# Altium PCB PCB.PcbDoc (part 1 of 2)
Units mm, origin at the board's own origin, x right, y up, seen from the top; angles counter-clockwise.
Board outline 140.5 x 50 mm, 2 copper layers (Top Layer, Bottom Layer), stack 1.69 mm thick; 191 components, 142 nets, 1154 pads, 548 vias.
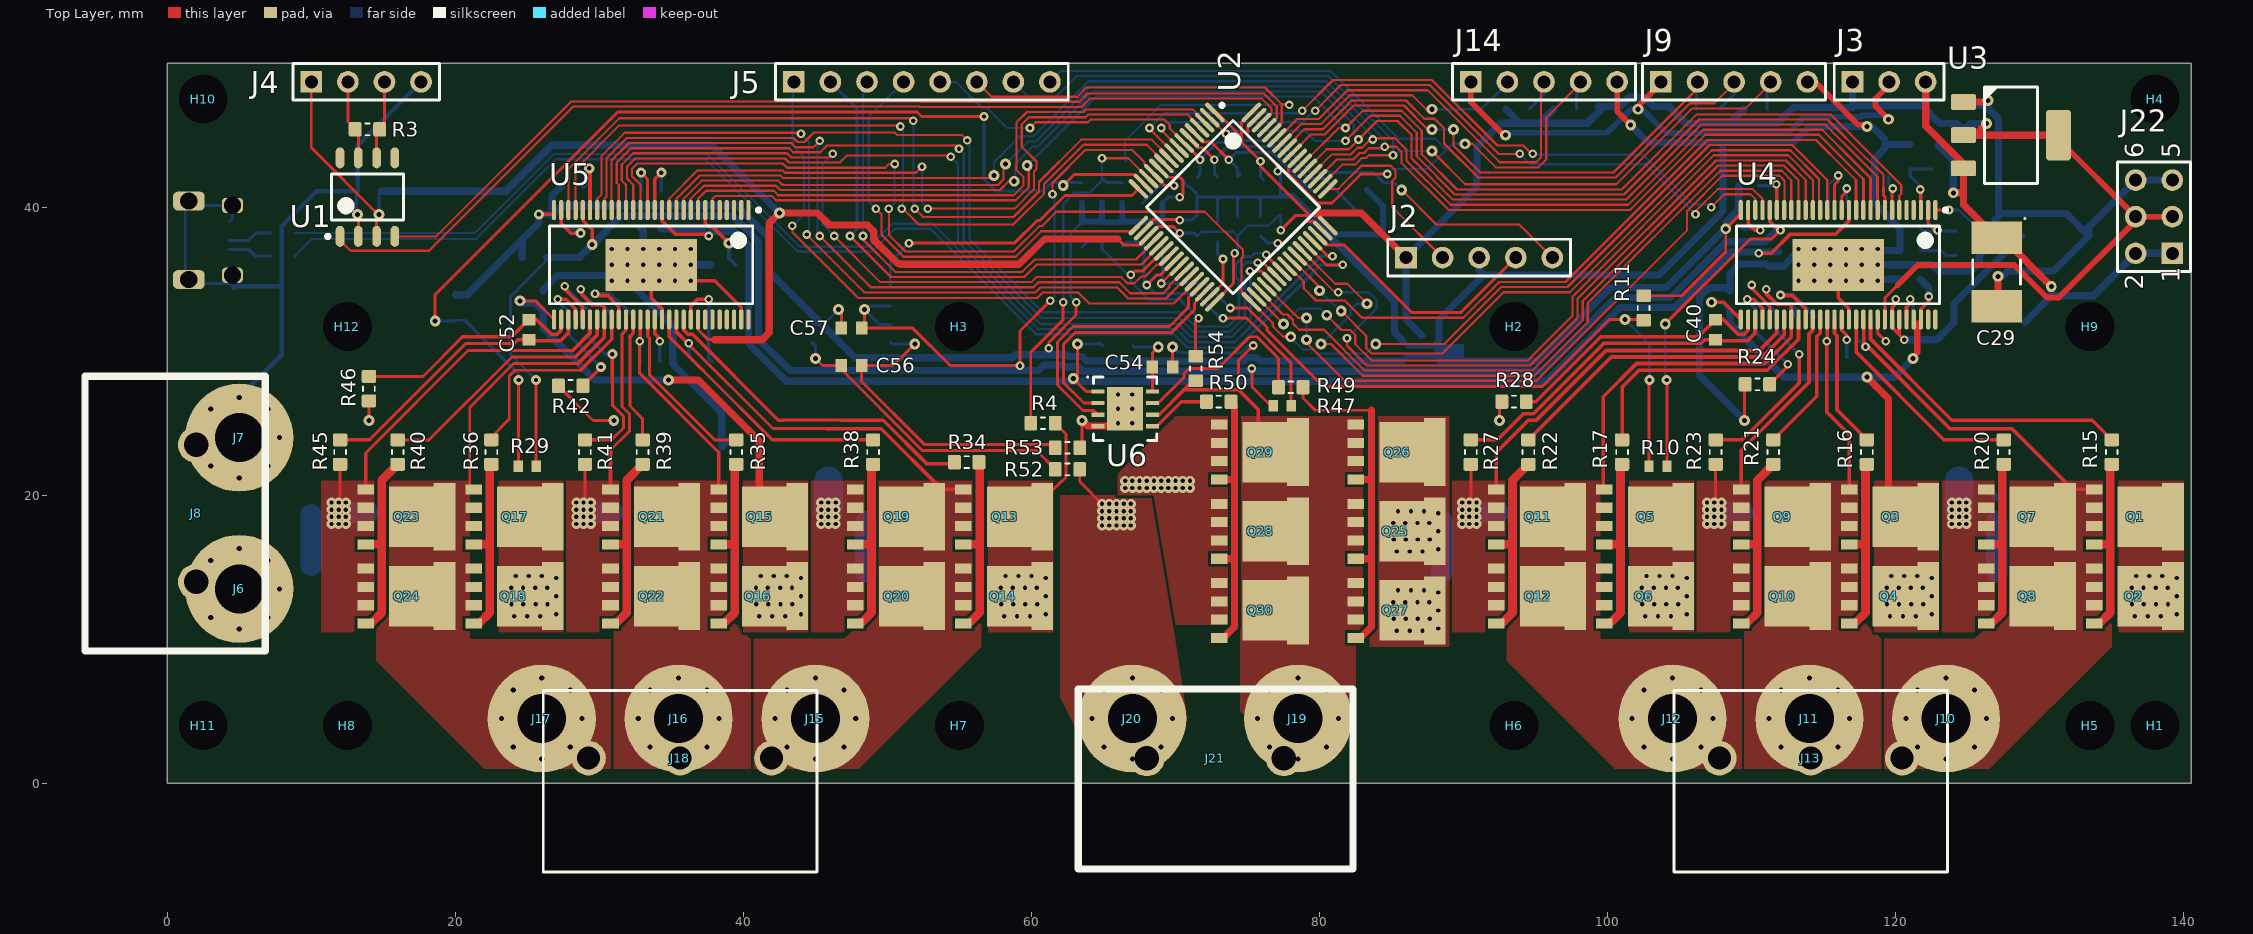
[diagram p0: Top Layer view]
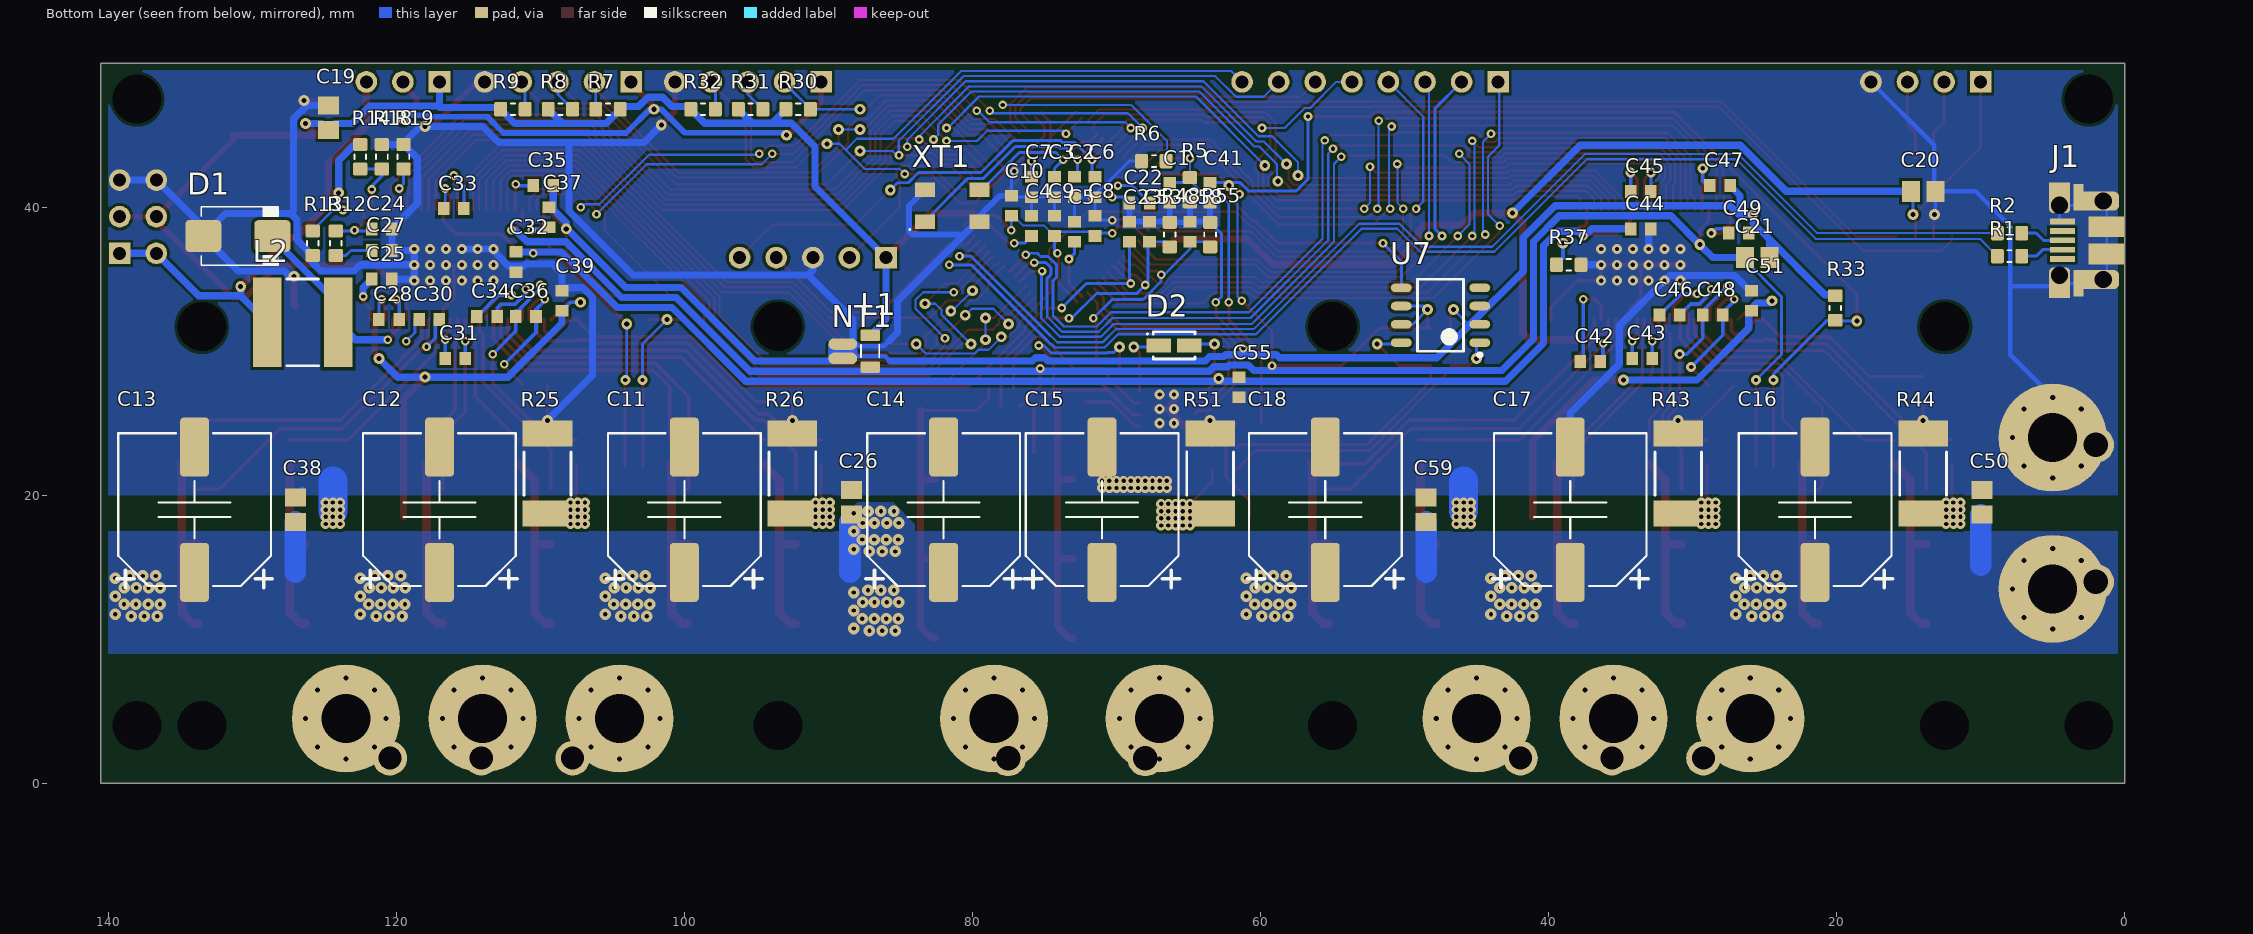
[diagram p1: Bottom Layer view, seen from below]
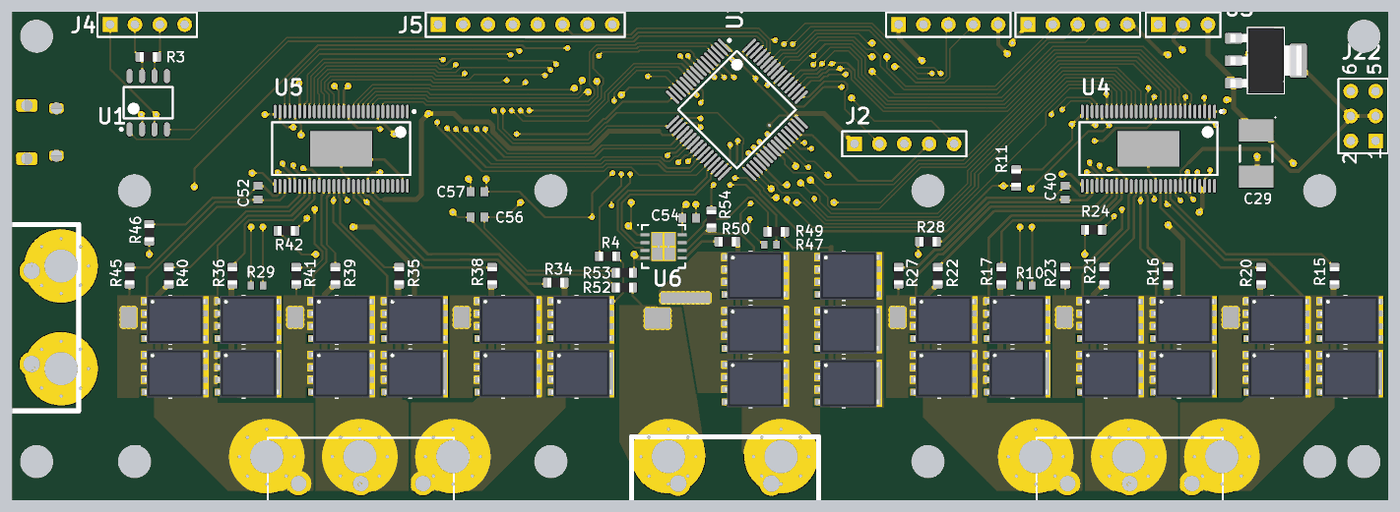
[diagram p3: 3D render of the assembled board from above, using the file's embedded part models]

## Layer stack, top to bottom
Top Solder: solder mask 0.0102, Solder Resist, Dk 3.5
Top Layer: signal copper 0.07
Dielectric1: core 1.55, FR-4, Dk 4.8
Bottom Layer: signal copper 0.07
Bottom Solder: solder mask 0.0102, Solder Resist, Dk 3.5

## Board outline
0,0 0,50 140.5,50 140.5,0

## Design rules (kind name [scope] priority, off if disabled: settings)
Clearance [All] p1: gap=0.203 except(0.185: SMDPad-SMDPad)
ComponentClearance ComponentClearance_1 [HasFootprint('MC000054') or HasFootprint('MC000051')] p1: gap=-100 collisioncheckmode=3 verticalgap=0.254 showdistances=FALSE
ComponentClearance [All] p2: gap=0.254 collisioncheckmode=3 verticalgap=0.254 showdistances=FALSE
DiffPairsRouting [All] p1 off: maxlimit=0.254 minlimit=0.254 mostfreqgap=0.254 toplayer_minwidth=0.381 toplayer_maxwidth=0.381 toplayer_prefwidth=0.381 bottomlayer_minwidth=0.381 bottomlayer_maxwidth=0.381 bottomlayer_prefwidth=0.381 maxuncoupledlength=12.7
FanoutControl Fanout_LCC [IsLCC] p1: bgadir=Out bgaviamode=Centered fanoutstyle=Auto fanoutdirection=Alternating viagrid=0.025 // Fanout_LCC (Default Rule)
FanoutControl Fanout_SOIC [IsSOIC] p2: bgadir=Out bgaviamode=Centered fanoutstyle=Auto fanoutdirection=Alternating viagrid=0.025 // Fanout_SOIC (Default Rule)
FanoutControl Fanout_Small [(CompPinCount < 5)] p3: bgadir=Out bgaviamode=Centered fanoutstyle=Auto fanoutdirection=OutThenIn viagrid=0.025 // Fanout_Small (Default Rule)
FanoutControl Fanout_Default [All] p4: bgadir=Out bgaviamode=Centered fanoutstyle=Auto fanoutdirection=Alternating viagrid=0.025 // Fanout_Default (Default Rule)
HoleSize [All] p1: absolutevalues=TRUE maxlimit=6.35 minlimit=0.3 maxpercent=80.000 minpercent=20.000
HoleToHoleClearance [All] p1 off: gap=0.45 allowstackedmicrovias=TRUE
MinimumAnnularRing [All] p1: minimumring=0.15
MinimumSolderMaskSliver [InPadClass('All Pads') And Not InComponent('J1')] p1: minsoldermaskwidth=0.18
PolygonConnect [All] p1: connectstyle=Direct reliefconductorwidth=0.254 reliefentries=4 polygonreliefangle="90 Angle" airgapwidth=0.254
RoutingCorners [All] p1 off: cornerstyle=45-Degree minsetback=2.54 maxsetback=2.54
RoutingLayers [All] p1 off: top layer_v5=TRUE bottom layer_v5=TRUE
RoutingPriority [All] p1 off: routingpriority=0
RoutingTopology [All] p1 off: topology=Shortest
RoutingVias [All] p1 off: holewidth=0.35 width=0.75 viastyle="Through Hole" minholewidth=0.3 minwidth=0.6 maxholewidth=1 maxwidth=1.7
SilkToBoardRegionClearance [All] p1 off:
SilkToSilkClearance [All] p1 off: silktosilkclearance=0.254
SilkToSolderMaskClearance [IsPad] p1 off: minsilkscreentomaskgap=0.2 clearancetoexposedcopper=FALSE
SolderMaskExpansion [All] p1: expansion=0.102
UnRoutedNet [All] p1 off:
Width [All] p1: maxlimit=5 minlimit=0.152 preferedwidth=0.203 toplayer_minwidth=0.152 bottomlayer_prefwidth=0.203 minimp=50.000000 maximp=50.000000 favimp=50.000000 checkconnectedcopper=TRUE
12 further rules are at their usual default settings.

## Classes and differential pairs
component class Top: C1 C2 C3 C4 C5 C6 C7 C8 C9 C10 C11 C12 C13 C14 C15 C16 C17 C18 C19 C20 C21 C22 H1 H2 H3 H4 H5 H6 H7 H8 H9 H10 H11 H12 J1 J2 J3 J4 J5 J6 J7 J8 J22 L1 NT1 R1 R2 R3 R4 R5 R6 U1 U2 U3 XT1
component class "Motor 1": C41 C42 C43 C44 C45 C46 C47 C48 C49 C50 C51 C52 C59 J14 J15 J16 J17 J18 Q13 Q14 Q15 Q16 Q17 Q18 Q19 Q20 Q21 Q22 Q23 Q24 R29 R30 R31 R32 R33 R34 R35 R36 R37 R38 R39 R40 R41 R42 R43 R44 R45 R46 U5
component class "Motor 0": C23 C24 C25 C26 C27 C28 C29 C30 C31 C32 C33 C34 C35 C36 C37 C38 C39 C40 D1 J9 J10 J11 J12 J13 L2 Q1 Q2 Q3 Q4 Q5 Q6 Q7 Q8 Q9 Q10 Q11 Q12 R7 R8 R9 R10 R11 R12 R13 R14 R15 R16 R17 R18 R19 R20 R21 R22 R23 R24 R25 R26 R27 R28 U4
component class Aux: C53 C54 C55 C56 C57 C58 D2 J19 J20 J21 Q25 Q26 Q27 Q28 Q29 Q30 R47 R48 R49 R50 R51 R52 R53 R54 R55 U6 U7

## Components (designator, comment, footprint, x,y, rotation, side; value= is the part's Value field where it differs from the comment)
C1 "" 1608[0603] 66.3,41 r90 bottom
C2 "" 1608[0603] 72.9,41.4 r270 bottom
C3 "" 1608[0603] 74.3,41.4 r270 bottom
C4 "" 1608[0603] 75.9,38.7 r270 bottom
C5 "" 1608[0603] 72.9,38.3 r270 bottom
C6 "" 1608[0603] 71.5,41.4 r90 bottom
C7 "" 1608[0603] 75.9,41.4 r270 bottom
C8 "" 1608[0603] 71.5,38.7 r90 bottom
C9 "" 1608[0603] 74.3,38.7 r90 bottom
C10 "" 1608[0603] 77.3,40.1 r90 bottom
C11 "EEEFP1E471AP" CAP_ELEC_SIZE_G 100,19 r180 bottom
C12 "EEEFP1E471AP" CAP_ELEC_SIZE_G 117,19 r180 bottom
C13 "EEEFP1E471AP" CAP_ELEC_SIZE_G 134,19 r180 bottom
C14 "EEEFP1E471AP" CAP_ELEC_SIZE_G 82,19 r180 bottom
C15 "EEEFP1E471AP" CAP_ELEC_SIZE_G 71,19 r180 bottom
C16 "EEEFP1E471AP" CAP_ELEC_SIZE_G 21.5,19 r180 bottom
C17 "EEEFP1E471AP" CAP_ELEC_SIZE_G 38.5,19 r180 bottom
C18 "EEEFP1E471AP" CAP_ELEC_SIZE_G 55.5,19 r180 bottom
C19 "" CAPC2012X09N 124.7,46.2 r270 bottom
C20 "" CAPC2012X09N 14,41.1 r0 bottom
C21 "" CAPC2012X09N 25.5,36.5 r0 bottom
C22 "" 1608[0603] 68.4,40.3 r0 bottom
C23 "" 1608[0603] 69.1,38.3 r270 bottom
C24 "" 1608[0603] 121,38.5 r180 bottom
C25 "24V" 1608[0603] 121,35 r180 bottom
C26 "24V" CAPC2012X09N 88.4,19.5 r270 bottom
C27 "" 1608[0603] 121,37 r180 bottom
C28 "10V" 1608[0603] 120.5,32.2 r0 bottom
C29 "T495C686M016ATE250" CAPCP6032X28N 127,35.5 r270 top
C30 "16V" 1608[0603] 117.7,32.2 r0 bottom
C31 "16V" 1608[0603] 115.9,29.5 r0 bottom
C32 "16V" 1608[0603] 111.7,36.191 r90 bottom
C33 "24V" 1608[0603] 116,39.9 r180 bottom
C34 "16V" 1608[0603] 113.7,32.4 r0 bottom
C35 "6.3V" 1608[0603] 109.8,41.5 r0 bottom
C36 "General 0603 capacitor" 1608[0603] 111,32.4 r180 bottom
C37 "10V" 1608[0603] 109.4,39.3 r270 bottom
C38 "24V" CAPC2012X09N 127,19 r270 bottom
C39 "24V" 1608[0603] 108.5,33.5 r90 bottom
C40 "General 0603 capacitor" 1608[0603] 107.5,31.5 r90 top
C41 "" 1608[0603] 63.5,41 r90 bottom
C42 "16V" 1608[0603] 37.1,29.3 r0 bottom
C43 "16V" 1608[0603] 33.5,29.5 r0 bottom
C44 "16V" 1608[0603] 33.6,38.5 r0 bottom
C45 "24V" 1608[0603] 33.6,41.1 r180 bottom
C46 "16V" 1608[0603] 31.6,32.5 r0 bottom
C47 "6.3V" 1608[0603] 28.1,41.5 r0 bottom
C48 "General 0603 capacitor" 1608[0603] 28.6,32.5 r180 bottom
C49 "10V" 1608[0603] 26.8,38.2 r0 bottom
C50 "24V" CAPC2012X09N 9.9,19.5 r270 bottom
C51 "24V" 1608[0603] 25.9,33.5 r90 bottom
C52 "General 0603 capacitor" 1608[0603] 25.1,31.5 r90 top
C53 "" 1608[0603] 67.7,38.3 r270 bottom
C54 "16V" 1608[0603] 69.1,28.9 r0 top
C55 "16V" 1608[0603] 61.5,27.5 r90 bottom
C56 "General 0603 capacitor" 1608[0603] 47.5,29 r0 top
C57 "" 1608[0603] 47.5,31.6 r180 top
C58 "" 1608[0603] 64.9,38.3 r270 bottom
C59 "24V" CAPC2012X09N 48.5,19 r270 bottom
D1 "SS13B" DO-214AA 131,38 r180 bottom
D2 "MBR140SFT1G" DIOM2717X10N 66,30.4 r180 bottom
H1 "M3" "M3 Hole" 138,4 r0 top
H2 "M3" "M3 Hole" 93.5,31.7 r0 top
H3 "M3" "M3 Hole" 55,31.7 r0 top
H4 "M3" "M3 Hole" 138,47.5 r0 top
H5 "M3" "M3 Hole" 133.5,4 r0 top
H6 "M3" "M3 Hole" 93.5,4 r0 top
H7 "M3" "M3 Hole" 55,4 r0 top
H8 "M3" "M3 Hole" 12.5,4 r0 top
H9 "M3" "M3 Hole" 133.5,31.7 r0 top
H10 "M3" "M3 Hole" 2.5,47.5 r0 top
H11 "M3" "M3 Hole" 2.5,4 r0 top
H12 "M3" "M3 Hole" 12.5,31.7 r0 top
J1 "MICRO USB B" USB_0103594-0001LF 1.5,37.7 r90 bottom
J2 "Header 5" HDR1X5 86,36.5 r0 top
J3 "Header 3" HDR1X3 117,48.7 r0 top
J4 "Header 4" HDR1X4 10,48.7 r0 top
J5 "Header 8" HDR1X8 43.5,48.7 r0 top
J6 "M3" "M3 Spade Hole" 5,13.5 r0 top
J7 "M3" "M3 Spade Hole" 5,24 r0 top
J8 "MC000054" MC000054 2,23.5 r270 top
J9 "Header 5" HDR1X5 103.7,48.7 r0 top
J10 "M3" "M3 Spade Hole" 123.5,4.5 r0 top
J11 "M3" "M3 Spade Hole" 114,4.5 r0 top
J12 "M3" "M3 Spade Hole" 104.5,4.5 r0 top
J13 "MC000051" MC000051 107.75,1.75 r0 top
J14 "Header 5" HDR1X5 90.5,48.7 r0 top
J15 "M3" "M3 Spade Hole" 45,4.5 r0 top
J16 "M3" "M3 Spade Hole" 35.5,4.5 r0 top
J17 "M3" "M3 Spade Hole" 26,4.5 r0 top
J18 "MC000051" MC000051 29.25,1.75 r0 top
J19 "M3" "M3 Spade Hole" 78.5,4.5 r0 top
J20 "M3" "M3 Spade Hole" 67,4.5 r0 top
J21 "MC000054" MC000054 68,1.75 r0 top
J22 "Header 3X2" HDR2X3 139.2,36.8 r90 top
L1 "2508056017Y2" FBC2012N 87.1,30 r90 bottom
L2 "NR6028T220M" INDC6060X28N 126.5,32 r0 bottom
NT1 "2mm" NetTie_2mm 89,30.5 r270 bottom net-tie
Q1 "NTMFS4937NT1G" SO8FL 136.5,18.5 r270 top
Q2 "NTMFS4937NT1G" SO8FL_FILL 136.5,13 r270 top
Q3 "NTMFS4937NT1G" SO8FL 119.5,18.5 r270 top
Q4 "NTMFS4937NT1G" SO8FL_FILL 119.5,13 r270 top
Q5 "NTMFS4937NT1G" SO8FL 102.5,18.5 r270 top
Q6 "NTMFS4937NT1G" SO8FL_FILL 102.5,13 r270 top
Q7 "NTMFS4937NT1G" SO8FL 129,18.5 r270 top
Q8 "NTMFS4937NT1G" SO8FL 129,13 r270 top
Q9 "NTMFS4937NT1G" SO8FL 112,18.5 r270 top
Q10 "NTMFS4937NT1G" SO8FL 112,13 r270 top
Q11 "NTMFS4937NT1G" SO8FL 95,18.5 r270 top
Q12 "NTMFS4937NT1G" SO8FL 95,13 r270 top
Q13 "NTMFS4937NT1G" SO8FL 58,18.5 r270 top
Q14 "NTMFS4937NT1G" SO8FL_FILL 58,13 r270 top
Q15 "NTMFS4937NT1G" SO8FL 41,18.5 r270 top
Q16 "NTMFS4937NT1G" SO8FL_FILL 41,13 r270 top
Q17 "NTMFS4937NT1G" SO8FL 24,18.5 r270 top
Q18 "NTMFS4937NT1G" SO8FL_FILL 24,13 r270 top
Q19 "NTMFS4937NT1G" SO8FL 50.5,18.5 r270 top
Q20 "NTMFS4937NT1G" SO8FL 50.5,13 r270 top
Q21 "NTMFS4937NT1G" SO8FL 33.5,18.5 r270 top
Q22 "NTMFS4937NT1G" SO8FL 33.5,13 r270 top
Q23 "NTMFS4937NT1G" SO8FL 16.5,18.5 r270 top
Q24 "NTMFS4937NT1G" SO8FL 16.5,13 r270 top
Q25 "NTMFS4937NT1G" SO8FL_FILL 85.25,17.5 r270 top
Q26 "NTMFS4937NT1G" SO8FL 85.25,23 r270 top
Q27 "NTMFS4937NT1G" SO8FL_FILL 85.25,12 r270 top
Q28 "NTMFS4937NT1G" SO8FL 75.75,17.5 r270 top
Q29 "NTMFS4937NT1G" SO8FL 75.75,23 r270 top
Q30 "NTMFS4937NT1G" SO8FL 75.75,12 r270 top
R1 "RES_0603" RESC1608X55N 8,36.6 r0 bottom
R2 "RES_0603" RESC1608X55N 8,38.2 r0 bottom
R3 "RES_0603" RESC1608X55N 13.9,45.4 r180 top
R4 "RES_0603" RESC1608X55N 60.8,25 r180 top
R5 "RES_0603" RESC1608X55N 64.9,41.2 r270 bottom
R6 "RES_0603" RESC1608X55N 67.4,43.2 r0 bottom
R7 "RES_0603" RESC1608X55N 105.3,46.8 r0 bottom
R8 "RES_0603" RESC1608X55N 108.6,46.8 r180 bottom
R9 "RES_0603" RESC1608X55N 111.9,46.8 r180 bottom
R10 "NTCS0603E3153JMT" RESC1608X06L 103.5,22 r0 top
R11 "RES_0603" RESC1608X55N 102.5,33 r90 top
R12 "RES_0603" RESC1608X55N 124.2,37.5 r270 bottom
R13 "RES_0603" RESC1608X55N 125.8,37.5 r270 bottom
R14 "RES_0603" RESC1608X55N 122.5,43.5 r270 bottom
R15 "RES_0603" RESC1608X55N 135,23 r270 top
R16 "RES_0603" RESC1608X55N 118,23 r270 top
R17 "RES_0603" RESC1608X55N 101,23 r270 top
R18 "RES_0603" RESC1608X55N 121,43.5 r90 bottom
R19 "RES_0603" RESC1608X55N 119.5,43.5 r90 bottom
R20 "RES_0603" RESC1608X55N 127.5,23 r270 top
R21 "RES_0603" RESC1608X55N 111.5,23 r270 top
R22 "RES_0603" RESC1608X55N 94.5,23 r270 top
R23 "RES_0603" RESC1608X55N 107.5,23 r90 top
R24 "RES_0603" RESC1608X55N 110.4,27.7 r0 top
R25 "CSR2512C0R0005F" RESC6432X09N 109.5,21.5 r270 bottom
R26 "CSR2512C0R0005F" RESC6432X09N 92.5,21.5 r270 bottom
R27 "RES_0603" RESC1608X55N 90.5,23 r90 top
R28 "RES_0603" RESC1608X55N 93.5,26.5 r0 top
R29 "NTCS0603E3153JMT" RESC1608X06L 25,22 r0 top
R30 "RES_0603" RESC1608X55N 92.1,46.8 r180 bottom
R31 "RES_0603" RESC1608X55N 95.4,46.8 r180 bottom
R32 "RES_0603" RESC1608X55N 98.7,46.8 r180 bottom
R33 "RES_0603" RESC1608X55N 20.1,33 r90 bottom
R34 "RES_0603" RESC1608X55N 55.5,22.3 r0 top
R35 "RES_0603" RESC1608X55N 39.5,23 r270 top
R36 "RES_0603" RESC1608X55N 22.5,23 r270 top
R37 "RES_0603" RESC1608X55N 38.6,36 r180 bottom
R38 "RES_0603" RESC1608X55N 49,23 r270 top
R39 "RES_0603" RESC1608X55N 33,23 r270 top
R40 "RES_0603" RESC1608X55N 16,23 r270 top
R41 "RES_0603" RESC1608X55N 29,23 r90 top
R42 "RES_0603" RESC1608X55N 28,27.6 r0 top
R43 "CSR2512C0R0005F" RESC6432X09N 31,21.5 r270 bottom
R44 "CSR2512C0R0005F" RESC6432X09N 14,21.5 r270 bottom
R45 "RES_0603" RESC1608X55N 12,23 r90 top
R46 "RES_0603" RESC1608X55N 14,27.4 r90 top
R47 "NTCS0603E3153JMT" RESC1608X06L 77.4,26.2 r180 top
R48 "RES_0603" RESC1608X55N 66.3,38.1 r90 bottom
R49 "RES_0603" RESC1608X55N 78,27.5 r0 top
R50 "RES_0603" RESC1608X55N 73,26.5 r0 top
R51 "CSR2512C0R0005F" RESC6432X09N 63.5,21.5 r90 bottom
R52 "RES_0603" RESC1608X55N 62.5,21.8 r0 top
R53 "RES_0603" RESC1608X55N 62.5,23.3 r0 top
R54 "RES_0603" RESC1608X55N 71.4,28.8 r90 top
R55 "RES_0603" RESC1608X55N 63.5,38.1 r90 bottom
U1 "SN65HVD232D" SOIC127P600X175-8N 13.9,40.7 r90 top
U2 "STM32F405RGT6" STM-LQFP64_N 74,40 r315 top
U3 "AP1117E33G-13" SOT223 128,45 r0 top
U4 "DRV8301" TSSOP50P810X120_HS-57N 116,36 r270 top
U5 "DRV8301" TSSOP50P810X120_HS-57N 33.6,36 r270 top
U6 "LM5109BSD/NOPB" SON80P400X80_HS-9N 66.5,26 r0 top
U7 "AD8418WBRZ" SOIC127P600X175-8N 47.5,32.5 r0 bottom
XT1 "ABM3B-8.000MHZ-10-1-U-T" DFN220P320X110-4N 81.4,40.1 r180 bottom

## Footprints (in the part's own frame and the unit in brackets; to place one, negate y for a bottom-side part, rotate by r counter-clockwise, add the part's x,y. Pads: shape width x height; smd on the part's side, far side on the other; paste and mask are expansions set on the pad)
1608[0603] [mm] "Chip Capacitor, Body 1.6x0.8mm, IPC High Density"
  rect 0.8x0.9 smd: 1(-0.7,0) 2(0.7,0)
  body extent -0.87,-0.48 0.87,0.48, height 1.3
CAP_ELEC_SIZE_G [mm] "Capacitor, polarized, aluminum can; 10.0x10.2mm DxH"
  round 0.635 on Mech15: 0(0,0)
  rrect25% 2x4.1 smd: 1(0,-4.35) 2(0,4.35)
  silkscreen extent -5.4,-5.4 5.4,5.3, body extent -5.25,-6 5.25,6, height 10.5
CAPC2012X09N [mm] "Chip Capacitor, 2-Leads, Body 2.00x1.25mm, IPC Medium Density"
  rect 1.25x1.45 smd: 1(-0.85,0) 2(0.85,0)
  body extent -1.08,-0.7 1.07,0.7, height 0.95
CAPCP6032X28N [mm] "Chip Capacitor, 2-Leads, Body 6.00x3.20mm, IPC Medium Density"
  rect 2.25x3.5 smd: 1(-2.375,0) 2(2.375,0)
  silkscreen extent -3.76,-1.65 0.85,2.01, body extent -3.15,-1.75 3.15,1.75, height 2.8
DFN220P320X110-4N [mm] "DFN, 4-Leads, Body 5.00x3.20mm, Pitch 2.20mm, IPC Medium Density"
  rect 1.4x1 smd: 1(-1.9,-1.1) 3(1.9,1.1) G(-1.9,1.1) G(1.9,-1.1)
  silkscreen extent -3,-1.7 -2.9,-1.6, body extent -2.55,-1.65 2.55,1.65, height 1.1
DIOM2717X10N [mm] "Molded Diode, 2-Leads, Body 2.70x1.65mm, IPC Medium Density"
  rect 1.7x1 smd: A(1.05,0) K(-1.05,0)
  silkscreen extent -1.9,-0.95 1.45,0.95, body extent -1.45,-0.9 1.45,0.9, height 1
DO-214AA [mm] "JEDEC DO214 variation AA. SMB"
  round 0.508 on Mech15: 0(0,0)
  rrect25% 2.5x2.2 smd: A(-2.4,0) K(2.4,0)
  silkscreen extent -2.54,-2.03 2.79,2.03, body extent -2.8,-1.97 2.8,1.98, height 2.62
FBC2012N [mm] "Ferrite Bead Chip, Body 2.0x1.2mm, 0805, IPC Medium Density"
  round 0.508 on Mech15: 0(0,0)
  rrect25% 0.8x1.35 smd: 1(-1.1,0) 2(1.1,0)
  silkscreen extent -0.43,-0.64 0.46,0.63, body extent -1,-0.62 1,0.63, height 0.9
HDR1X3 [mm] "Connector; Header; 3 Position"
  rect 1.5x1.5 hole 0.9: 1(0,0)
  round 1.5 hole 0.9: 2(2.54,0) 3(5.08,0)
  silkscreen extent -1.27,-1.27 6.35,1.27
HDR1X4 [mm] "Connector; Header; 4 Position"
  rect 1.5x1.5 hole 0.9: 1(0,0)
  round 1.5 hole 0.9: 2(2.54,0) 3(5.08,0) 4(7.62,0)
  silkscreen extent -1.27,-1.27 8.89,1.27
HDR1X5 [mm] "Connector; Header; 5 Position"
  rect 1.5x1.5 hole 0.9: 1(0,0)
  round 1.5 hole 0.9: 2(2.54,0) 3(5.08,0) 4(7.62,0) 5(10.16,0)
  silkscreen extent -1.27,-1.27 11.43,1.27
HDR1X8 [mm] "Connector; Header; 8 Position"
  rect 1.5x1.5 hole 0.9: 1(0,0)
  round 1.5 hole 0.9: 2(2.54,0) 3(5.08,0) 4(7.62,0) 5(10.16,0) 6(12.7,0) 7(15.24,0) 8(17.78,0)
  silkscreen extent -1.27,-1.27 19.05,1.27
HDR2X3 [mm] "Connector; Header; 3x2 Position"
  rect 1.5x1.5 hole 0.9: 1(0,0)
  round 1.5 hole 0.9: 2(0,2.54) 3(2.54,0) 4(2.54,2.54) 5(5.08,0) 6(5.08,2.54)
  silkscreen extent -1.27,-1.27 6.35,3.81
INDC6060X28N [mm] "Chip Inductor, 2-Leads, Body 6.00x6.00mm, IPC Medium Density"
  rect 1.98x6.22 smd: 1(-2.46,0) 2(2.46,0)
  silkscreen extent -1.1,-3.01 1.1,3.01, body extent -3.1,-3.1 3.1,3.1, height 2.8
"M3 Hole" [mm] "M3 Hole with no copper"
  round 3 hole 3.4 unplated: 1(0,0)
"M3 Spade Hole" [mm]
  round 7.5 hole 3.4: 1(0,0)
MC000051 [mm] "TERMINAL BLOCK, WIRE TO BRD, 3POS, 10AWG"
  round 2.4 hole 1.6: 1(0,0) 2(6.35,0) 3(12.7,0)
  silkscreen extent -3.15,-7.9 15.85,4.7
MC000054 [mm] "MULTICOMP  Wire-To-Board Terminal Block, 2, 600 V, 30 A, 24 AWG, 10 AWG"
  round 2.5 hole 1.7: 1(0,0) 2(9.52,0)
  silkscreen extent -4.76,-7.7 14.32,4.8
NetTie_2mm [mm] "Net tie, 2mm round"
  oval 0.8x2 smd paste-2: 1(0,0) 2(1,0)
  Top Layer region: 0,1 1,1 1,-1 0,-1
RESC1608X06L [mm] "Chip Resistor, 2-Leads, Body 1.60x0.80mm, IPC High Density"
  rect 0.65x0.8 smd: 1(-0.625,0) 2(0.625,0)
  body extent -0.85,-0.45 0.85,0.45, height 0.6
RESC1608X55N [mm] "Chip Resistor, Body 1.6x0.8mm, EIA 0603, IPC Medium Density"
  round 0.254 on Mech15: 0(0,0)
  rrect25% 0.9x1 smd: 1(-0.85,0) 2(0.85,0)
  Top Layer pour cut-out: -0.6,0.5 -0.4,0.7 0.4,0.7 0.6,0.5 0.6,-0.5 0.4,-0.7 -0.4,-0.7 -0.6,-0.5
  silkscreen extent -0.15,-0.41 0.15,0.41, body extent -0.87,-0.47 0.88,0.48, height 0.54
RESC6432X09N [mm] "Chip Resistor, 2-Leads, Body 6.40x3.20mm, IPC Medium Density"
  rect 1.8x3.45 smd: 1(-2.775,0) 2(2.775,0)
  silkscreen extent -1.5,-1.62 1.5,1.62, body extent -3.32,-1.73 3.32,1.73, height 0.9
SO8FL [mm] "DFN5 5x6, 1.27P  (SO-8FL)  CASE 488AA"
  rect 0.9x0.6 on Top Paste: 7(0,2) 7(0,1.15) 7(0,0.3) 7(0,-0.55) 9(-1.15,2) 9(-1.15,1.15) 9(-1.15,0.3) 9(-1.15,-0.55) 10(1.15,2) 10(1.15,1.15) 10(1.15,0.3) 10(1.15,-0.55)
  rect 0.6x0.9 on Top Paste: 11(-1.875,3) 11(-0.65,3) 11(0.65,3) 11(1.875,3)
  rect 4.7x1.5 smd paste-10 mask+0.075: D(0,2.75)
  rect 4.2x2.2 smd paste-10 mask+0.075: D(0,1.35) D(0,0)
  rect 0.7x1.15 smd paste-0.05 mask+0.075: G(1.905,-2.725) S(-1.905,-2.725) S(-0.635,-2.725) S(0.635,-2.725)
  body extent -2.57,-2.95 2.58,3.2, height 1.13
SO8FL_FILL [mm] "DFN5 5x6, 1.27P  (SO-8FL)  CASE 488AA. Full solder paste"
  rect 4.7x1.5 smd paste-10 mask+0.075: D(0,2.75)
  rect 4.2x2.2 smd paste-10 mask+0.075: D(0,1.35) D(0,0)
  rect 0.7x1.15 smd paste-0.05 mask+0.075: G(1.905,-2.725) S(-1.905,-2.725) S(-0.635,-2.725) S(0.635,-2.725)
  body extent -2.57,-2.95 2.58,3.2, height 1.13
SOIC127P600X175-8N [mm] "SOIC, 8-Leads, Body 4.90x3.90mm, Pitch 1.27mm, IPC Medium Density"
  oval 1.45x0.6 smd: 1(-2.725,1.905) 2(-2.725,0.635) 3(-2.725,-0.635) 4(-2.725,-1.905) 5(2.725,-1.905) 6(2.725,-0.635) 7(2.725,0.635) 8(2.725,1.905)
  silkscreen extent -2.85,-2.5 1.6,2.88, body extent -2,-2.5 2,2.5, height 1.75
SON80P400X80_HS-9N [mm] "SON, 8-Leads, Body 4.00x4.00mm, Pitch 0.80mm, Thermal Pad 3.00x2.49mm, IPC Medium Density"
  rect 0.9x0.3 smd mask+0: 1(-1.895,1.2) 2(-1.895,0.4) 3(-1.895,-0.4) 4(-1.895,-1.2) 5(1.895,-1.2) 6(1.895,-0.4) 7(1.895,0.4) 8(1.895,1.2)
  rect 2.49x3 smd paste-1.245 mask+0: 9(0,0)
  silkscreen extent -2.65,-2.2 2.2,2.25, body extent -2.05,-2.05 2.05,2.05, height 0.8
SOT223 [mm] "SOT223 /SC-73"
  round 1 on Mech15: 0(0,0)
  rrect25% 1.75x1.1 smd: 1(-3.3,2.3) 2(-3.3,0) 3(-3.3,-2.3)
  rrect25% 1.75x3.5 smd: 4(3.3,0)
  silkscreen extent -1.85,-3.35 1.85,3.35, body extent -3.65,-3.35 3.65,3.35, height 1.8
STM-LQFP64_N [mm] "Thin QFP, 64-Leads, Body 10x10mm, Pitch 0.5mm, IPC Medium Density"
  oval 1.8x0.3 smd: 1(-5.55,3.75) 2(-5.55,3.25) 3(-5.55,2.75) 4(-5.55,2.25) 5(-5.55,1.75) 6(-5.55,1.25) 7(-5.55,0.75) 8(-5.55,0.25) 9(-5.55,-0.25) 10(-5.55,-0.75) 11(-5.55,-1.25) 12(-5.55,-1.75) 13(-5.55,-2.25) 14(-5.55,-2.75) 15(-5.55,-3.25) 16(-5.55,-3.75) 33(5.55,-3.75) 34(5.55,-3.25) 35(5.55,-2.75) 36(5.55,-2.25) 37(5.55,-1.75) 38(5.55,-1.25) 39(5.55,-0.75) 40(5.55,-0.25) 41(5.55,0.25) 42(5.55,0.75) 43(5.55,1.25) 44(5.55,1.75) 45(5.55,2.25) 46(5.55,2.75) 47(5.55,3.25) 48(5.55,3.75)
  oval 0.3x1.8 smd: 17(-3.75,-5.55) 18(-3.25,-5.55) 19(-2.75,-5.55) 20(-2.25,-5.55) 21(-1.75,-5.55) 22(-1.25,-5.55) 23(-0.75,-5.55) 24(-0.25,-5.55) 25(0.25,-5.55) 26(0.75,-5.55) 27(1.25,-5.55) 28(1.75,-5.55) 29(2.25,-5.55) 30(2.75,-5.55) 31(3.25,-5.55) 32(3.75,-5.55) 49(3.75,5.55) 50(3.25,5.55) 51(2.75,5.55) 52(2.25,5.55) 53(1.75,5.55) 54(1.25,5.55) 55(0.75,5.55) 56(0.25,5.55) 57(-0.25,5.55) 58(-0.75,5.55) 59(-1.25,5.55) 60(-1.75,5.55) 61(-2.25,5.55) 62(-2.75,5.55) 63(-3.25,5.55) 64(-3.75,5.55)
  silkscreen extent -5.67,-4.25 4.25,4.57, body extent -5,-5 5,5, height 1.6
TSSOP50P810X120_HS-57N [mm] "TSSOP, 56-Leads, Body 14.00x6.10mm, Pitch 0.50mm, Thermal Pad 6.35x3.61mm, IPC Medium Density"
  oval 1.4x0.3 smd: 1(-3.8,6.75) 2(-3.8,6.25) 3(-3.8,5.75) 4(-3.8,5.25) 5(-3.8,4.75) 6(-3.8,4.25) 7(-3.8,3.75) 8(-3.8,3.25) 9(-3.8,2.75) 10(-3.8,2.25) 11(-3.8,1.75) 12(-3.8,1.25) 13(-3.8,0.75) 14(-3.8,0.25) 15(-3.8,-0.25) 16(-3.8,-0.75) 17(-3.8,-1.25) 18(-3.8,-1.75) 19(-3.8,-2.25) 20(-3.8,-2.75) 21(-3.8,-3.25) 22(-3.8,-3.75) 23(-3.8,-4.25) 24(-3.8,-4.75) 25(-3.8,-5.25) 26(-3.8,-5.75) 27(-3.8,-6.25) 28(-3.8,-6.75) 29(3.8,-6.75) 30(3.8,-6.25) 31(3.8,-5.75) 32(3.8,-5.25) 33(3.8,-4.75) 34(3.8,-4.25) 35(3.8,-3.75) 36(3.8,-3.25) 37(3.8,-2.75) 38(3.8,-2.25) 39(3.8,-1.75) 40(3.8,-1.25) 41(3.8,-0.75) 42(3.8,-0.25) 43(3.8,0.25) 44(3.8,0.75) 45(3.8,1.25) 46(3.8,1.75) 47(3.8,2.25) 48(3.8,2.75) 49(3.8,3.25) 50(3.8,3.75) 51(3.8,4.25) 52(3.8,4.75) 53(3.8,5.25) 54(3.8,5.75) 55(3.8,6.25) 56(3.8,6.75)
  rect 3.61x6.35 smd: 57(0,0)
  silkscreen extent -3.92,-7.05 2.7,7.58, body extent -3.1,-7.05 3.1,7.05, height 1.2
USB_0103594-0001LF [mm] "Micro USB B connector"
  rect 0.4x1.75 smd: 1(-1.3,2.825) 2(-0.65,2.825) 3(0,2.825) 4(0.65,2.825) 5(1.3,2.825)
  rect 1.6x1.46 smd: SH(-3.2,3.025) SH(3.2,3.025)
  rect 1.825x0.7 smd: SH(-2.987,1.7) SH(2.987,1.7)
  rrect50% 1.3x2.2 hole 1.2: SH(-2.725,0) SH(2.725,0)
  rrect50% 1.3x2.2 smd: SH(-2.725,0.875) SH(2.725,0.875)
  rrect50% 1.05x1.46 hole 1.2: SH(-2.425,3.025) SH(2.425,3.025)
  rect 1.425x2.5 smd: SH(-0.95,-0.25) SH(0.95,-0.25)

## Part data
C1 C2 C3 C4 C5 C6 C7 C8 C9 C10 C22 C23 C24 C25 C27 C28 C30 C31 C32 C33 C34 C35 C36 C37 C39 C40 C41 C42 C43 C44 C45 C46 C47 C48 C49 C51 C52 C53 C54 C55 C56 C57 C58: library part CAP_0603, "CAP General 0603"
C11 C12 C13 C14 C15 C16 C17 C18: "CAP, FP Series, 470 µF, 25 V, Radial Can - SMD, 10 mm"
C19 C20 C21 C26 C38 C50 C59: library part GRM219R6YA475KA73D, "CAP CER 4.7UF 35V X5R 0805"
C29: "CAP TANT 68UF 16V 20% 2312 250mOhm"
D1: "DIODE, SCHOTTK, RECTIF, 1A, 30V, SMB"
D2: "Rectifier Diode, Single, 40 V, 1 A, SOD-123FL, 2, 550 mV"
H1 H2 H3 H4 H5 H6 H7 H8 H9 H10 H11 H12: library part "M3 Hole", "M3 Hole with no copper"
J1: library part 10103594-0001LF, "MICRO USB B, RECEPTACLE, SMT, RA, 5WAY"
J2 J9 J14: "Header, 5-Pin"
J3: "Header, 3-Pin"
J4: "Header, 4-Pin"
J5: "Header, 8-Pin"
J6 J7 J10 J11 J12 J15 J16 J17 J19 J20: library part "M3 Spade Terminal", "M3 Spade Terminal"
J8 J21: "MULTICOMP Wire-To-Board Terminal Block, 2, 600 V, 30 A, 24 AWG, 10 AWG"
J13 J18: "TERMINAL BLOCK, WIRE TO BRD, 3POS, 10AWG"
J22: "Header, 3-Pin, Dual row"
L1: "FERRITE BEAD, 0.1OHM, 2A, 0805"
L2: "INDUCTOR 22UH 1.4A 175.5 MOHM"
NT1: library part NetTie_2mm
Q1 Q2 Q3 Q4 Q5 Q6 Q7 Q8 Q9 Q10 Q11 Q12 Q13 Q14 Q15 Q16 Q17 Q18 Q19 Q20 Q21 Q22 Q23 Q24 Q25 Q26 Q27 Q28 Q29 Q30: "MOSFET, N CH, 30V, 70A, SO-8 FL"
R1 R2 R3 R4 R5 R6 R7 R8 R9 R11 R12 R13 R14 R15 R16 R17 R18 R19 R20 R21 R22 R23 R24 R27 R28 R30 R31 R32 R33 R34 R35 R36 R37 R38 R39 R40 R41 R42 R45 R46 R48 R49 R50 R52 R53 R54 R55: "RES General 1% 0603"
R10 R29 R47: "THERMISTOR, 15K, 5%, SMD, NTC"
R25 R26 R43 R44 R51: "RES SMD 0.0005 OHM 1% 3W 2512"
U2: "ARM Cortex-M4 32-bit MCU+FPU, 210 DMIPS, 1024 kB Flash, 192 kB Internal RAM, 51 I/Os, 64-pin LQFP, -40 to 85 degC, Tray"
U3: "IC, LDO, REG, 3.3V, SOT223"
U4 U5: "MOTOR DRIVER, 3PH, 56HTSSOP"
U6: "DRIVER, MOSFET, HALF BRIDGE, WSON-8, 1A"
U7: "ANALOG DEVICES Current Sense Amplifier, Bidirectional, 1, 130 µA, NSOIC"
XT1: "Crystal 8MHz ±10ppm 10pF 200 Ohm -10°C ~ 60°C Surface Mount 4-SMD, No Lead (DFN, LCC)"

## Via types
v1: diameter 0.7, hole 0.3, Top Layer to Bottom Layer, 161 vias
v2: diameter 0.8, hole 0.3, Top Layer to Bottom Layer, 136 vias
v3: diameter 0.6, hole 0.3, Top Layer to Bottom Layer, 108 vias
v4: diameter 0.7, hole 0.35, Top Layer to Bottom Layer, 81 vias
v5: diameter 0.75, hole 0.35, Top Layer to Bottom Layer, 57 vias
v6: diameter 0.7, hole 0.3, Top Layer to Bottom Layer, tented bottom, 4 vias
v7: diameter 0.6, hole 0.3, Top Layer to Bottom Layer, tented both sides, 1 vias

## Nets (pads, with @x,y where several pads share a name; then routed paths per layer and width w, separated by ;. In a path a pad name is that pad's centre, name@x,y a point inside that pad or via, vN(x,y) a via of type N, cw(c..) or ccw(c..) an arc to the next point about the centre after c; other vN are vias at no path point)
5V: C29.1 J3.3 J22.1 J22.2 L2.2 R14.1 U3.3 | length 35.2
  Top Layer w0.5: J3.3@122.08,48.5 122.08,45.635 124.7,43.015 U3.3@124.7,42.7 124.7,41 ; v5(124,41) 124.7,41 ; v5(130.8,34.5) 127.425,37.875 C29.1@127,37.875 124.7,40.175 124.7,41
  Bottom Layer w0.5: R14.1@122.95,44.3 124,43.25 v5(124,41) ; L2.2@128.96,32 130.8,33.84 ; v5(130.8,34.5) 130.8,33.84 ; J22.1@139.2,36.8 J22.2@136.66,36.8 133.713,33.853 130.813,33.853 130.8,33.84
AGND: C1.1 C21.1 C22.2 C23.1 C35.1 C37.1 C41.1 C47.1 C49.1 C53.1 C57.2 C58.1 NT1.2 R5.2 R11.2 R33.2 R48.2 R55.2 U2.12 U4.28 U5.28 U7.2 U7.3 | length 149.6
  Top Layer w0.152: U2.12@68.838,42.687 69.444,42.081 70.319,42.081 70.4,42
  Top Layer w0.203: v5(46.6,32.9) 46.8,32.7 C57.2@46.8,31.6 ; v3(61.2,30.2) 61.2,30.61 63.1,32.51 v3(63.1,33.4) ; v3@70.145,40.7 v3(70.3,40.7) 70.505,40.905 70.505,41.895 70.4,42 ; R11.2@102.5,33.85 105.15,33.85 108.2,36.9 v4(108.2,38.5)
  Top Layer w0.25: v1(25.8,39.5) 26.8,39.5 26.85,39.55 U5.28@26.85,39.8 ; v4(108.2,38.5) 109.25,39.55 U4.28@109.25,39.8
  Bottom Layer w0.203: U7.2@44.775,31.865 45.435,31.865 45.565,31.865 v5(46.6,32.9) ; v3(63.1,33.4) 62.695,33.804 62.695,38.146 R55.2@63.5,38.95 ; C22.2@69.1,40.3 C22.2@69.5,40.7 ; 69.6,40.7 v3(70.3,40.7)
  Bottom Layer w0.3: 75.5,29.665 75.612,29.553 ; 85.717,29.317 86.053,29.653 88.004,29.653 NT1.2@88.34,29.317
  Bottom Layer w0.4: C41.1@63.5,40.3 R55.2@63.5,38.95 63.55,39 C58.1@64.9,39 ; R5.2@64.9,40.35 C58.1@64.9,39 ; C1.1@66.3,40.3 R48.2@66.3,38.95 ; C22.2@69.1,40.3 C23.1@69.1,39 C53.1@67.7,39 66.35,39 R48.2@66.3,38.95 ; C58.1@64.9,39 64.95,38.95 R48.2@66.3,38.95
  Bottom Layer w0.5: R33.2@20.025,33.925 20.825,33.925 24.65,37.75 ; C21.1@24.65,36.5 24.65,37.75 ; C47.1@27.4,41.5 26.703,40.803 26.703,39.403 ; 85.717,29.317 75.848,29.317 75.612,29.553 74.988,29.553 74.764,29.329 63.836,29.329 63.534,29.631 62.554,29.631 62.429,29.756 58.891,29.756 58.682,29.547 47.753,29.547 45.435,31.865 41.759,35.541 41.759,37.9 39.553,40.106 27.406,40.106 26.703,39.403 ; NT1.2@88.34,29.317 95.117,29.317 100.234,34.434 104.08,34.434 108.146,38.5 v4(108.2,38.5) 108.2,38.941 109.1,39.841 C35.1@109.1,41.5 ; 24.65,37.75 25.8,38.9 v1(25.8,39.5) 26.606,39.5 26.703,39.403
AUX_H_1: U2.30 U6.2 | length 17.2
  Top Layer w0.203: U6.2@64.605,26.4 63.639,26.4 62.22,27.819 62.22,30.481 63.053,31.314 69.744,31.314 71.311,32.881 71.311,33.358 U2.30@72.02,34.067
AUX_I_1: U2.16 U7.5 | length 21.1
  Top Layer w0.203: v3(51.5,37.5) 58.81,37.5 60.376,39.065 60.565,39.065 62.32,40.82 66.971,40.82 U2.16@67.424,41.273
  Bottom Layer w0.203: U7.5@50.225,34.405 50.225,36.225 v3(51.5,37.5)
AUX_L_1: U2.29 U6.3 | length 18.3
  Top Layer w0.203: U6.3@64.605,25.6 64.325,25.88 63.585,25.88 61.814,27.65 61.814,30.65 62.885,31.72 69.575,31.72 70.905,33.05 70.905,33.723 U2.29@71.523,34.341
AUX_TEMP_1: C53.2 R47.1 R48.1 U2.24 | length 22.5
  Top Layer w0.203: v3(68,34.6) 68.705,35.305 68.951,35.305 U2.24@69.899,36.252 ; v3(73.3,32.3) 74.929,32.3 78.025,29.204 R47.1@78.025,26.2
  Bottom Layer w0.203: R48.1@66.3,37.25 66.65,37.6 C53.2@67.7,37.6 ; C53.2@67.8,37.6 67.8,34.8 v3(68,34.6) 68.594,34.006 71.394,34.006 73.1,32.3 v3(73.3,32.3)
AUX_V_1: C58.2 R54.2 R55.1 U2.22 | length 16.6
  Top Layer w0.203: v3(66.9,35.3) 67.16,35.56 67.728,35.56 68.999,36.831 U2.22@69.127,36.831 ; R54.2@71.4,29.65 71.4,32.1 v3(71.6,32.3)
  Bottom Layer w0.203: R55.1@63.5,37.25 63.85,37.6 C58.2@64.9,37.6 64.9,37.1 66.7,35.3 v3(66.9,35.3) 66.9,34.845 68.145,33.6 70.3,33.6 v3(71.6,32.3)
AVCC: C21.2 C22.1 C57.1 L1.1 R10.2 R29.2 R47.2 U2.13 U4.24 U5.24 U7.6 U7.7 | length 189
  Top Layer w0.152: v3(61.455,40.9) 61.455,41.68 63.754,43.979 66.974,43.979 67.853,43.1 67.853,42.965 U2.13@68.485,42.333
  Top Layer w0.203: v1(25.6,28) 25.6,22.025 R29.2@25.625,22 ; v5(48.4,32.9) 48.4,31.8 C57.1@48.2,31.6 51.761,31.6 54.361,29 v3(59.2,29) 59.2,31.4 v3(61.3,33.5) ; U2.13@68.485,42.333 68.485,42.269 69.254,41.5 v3(69.9,41.5) ; v3(75.3,28.8) 75.3,27.535 76.635,26.2 R47.2@76.775,26.2 ; v5(104,31.9) 109.895,37.795 111.395,37.795 v3(112,38.4) ; v1(104.1,28) 104.125,27.975 R10.2@104.125,22
  Top Layer w0.25: U5.24@28.85,39.8 28.872,39.8 28.872,39.052 29.5,38.424 v5(29.5,37.4) ; U4.24@111.25,39.8 111.25,39.009 111.859,38.4 v3(112,38.4)
  Bottom Layer w0.152: v3(61.3,33.5) 61.6,33.8 61.6,40.755 v3(61.455,40.9)
  Bottom Layer w0.203: v1(25.6,28) 23.82,29.78 23.82,33.781 C21.2@26.539,36.5 ; U7.7@50.225,31.865 49.435,31.865 v5(48.4,32.9) 48.635,33.135 U7.6@50.225,33.135 ; C22.1@67.7,40.3 67.703,40.297 68.906,41.5 ; 69.006,41.5 v3(69.9,41.5) ; v5(104,31.9) 104,28.1 v1(104.1,28)
  Bottom Layer w0.5: C21.2@26.35,36.5 26.539,36.5 28.6,36.5 v5(29.5,37.4) 31.503,39.403 39.262,39.403 41.056,37.609 41.056,30.844 43.228,28.672 60.481,28.672 60.862,29.053 62.138,29.053 62.263,28.928 63.243,28.928 63.557,28.614 95.449,28.614 100.566,33.731 104.372,33.731 108.238,37.597 110.915,37.597 111.718,38.4 v3(112,38.4)
BOOT0_1: J5.6 R6.1 U2.60 | length 39.1
  Top Layer w0.152: J5.6@56.2,48.7 57.229,47.671 63.171,47.671 63.811,48.311 76.211,48.311 77.381,47.141 ; U2.60@76.787,45.162 U2.60@76.687,45.162 77.381,45.856 77.381,47.141 ; v3(77.9,47.1) 77.859,47.141 77.381,47.141
  Bottom Layer w0.152: R6.1@66.55,43.2 66.5,43.25 66.5,44.622 68.978,47.1 v3(77.9,47.1)
CAN_D_1: U1.1 U2.62 | length 71.2
  Top Layer w0.152: U1.1@11.995,37.975 11.995,37.705 12.729,36.971 18.173,36.971 28.188,46.985 52.208,46.985 52.234,46.96 63.465,46.96 64.041,47.536 75.981,47.536 76.67,46.846 76.67,46.559 U2.62@75.98,45.869
CAN_H_1: J4.2 R3.2 U1.7 | length 5.6
  Top Layer w0.203: J4.2@12.54,48.7 12.54,45.91 R3.2@13.05,45.4 13.265,45.185 U1.7@13.265,43.425
CAN_L_1: J4.3 R3.1 U1.6 | length 5.5
  Top Layer w0.203: U1.6@14.535,43.425 14.535,45.185 R3.1@14.75,45.4 15.08,45.73 J4.3@15.08,48.7
CAN_R_1: U1.4 U2.61 | length 67.5
  Top Layer w0.152: U1.4@15.805,37.975 18.675,37.975 28.041,47.341 52.355,47.341 52.381,47.315 63.318,47.315 63.894,47.891 76.128,47.891 77.026,46.994 77.026,46.208 U2.61@76.333,45.515
DCBUS: C11.1 C12.1 C13.1 C14.1 C15.1 C16.1 C17.1 C18.1 C25.1 C26.2 C38.2 C39.1 C50.2 C51.1 C59.2 J6.1 J8.2 Q1.D Q2.D Q3.D Q4.D Q5.D Q6.D Q13.D Q14.D Q15.D Q16.D Q17.D Q18.D Q25.D Q26.D Q27.D R4.1 U4.29 U4.53 U4.54 U5.29 | length 89.3
  Top Layer w0.203: v5(24.5,33.5) 25.55,33.5 U5.29@26.85,32.2 ; Q13.D@60.75,18.5 60.75,19.645 62.1,20.995 62.16,20.995 62.405,21.24 62.405,24.245 R4.1@61.65,25
  Top Layer w0.25: v5(107.2,33.4) 108.05,33.4 U4.29@109.25,32.2 ; v5(121.2,29.5) v5@121.25,29.55 ; U4.53@121.25,32.2 121.4,32.05 121.4,29.7 121.6,29.9 121.6,32.05 U4.54@121.75,32.2 121.772,32.2 121.772,32.948 122.3,33.476
  Top Layer w0.5: v5(34.8,28) 36.875,28 41.1,23.775 Q15.D@41.1,18.5 ; v5(118,28.2) 119.5,26.7 Q3.D@119.5,18.5
  Bottom Layer w0.25: v5(107.2,33.4) 107.9,33.4 C39.1@108.5,32.8
  Bottom Layer w0.5: v5(24.5,33.5) 24.653,33.347 25.553,33.347 26.1,32.8 26.1,31.6 29.7,28 v5(34.8,28) ; C39.1@108.5,32.8 108.5,31.964 112.264,28.2 v5(118,28.2) 119.9,28.2 v5(121.2,29.5) ; C25.1@121.7,35 122.3,34.4 v3(122.3,33.8)
  Bottom Layer w1.5: 10,15.15 C50.2@10,18.65 ; 48.5,14.65 C59.2@48.5,18.15 ; 88.5,14.65 C26.2@88.5,18.15 ; 127,14.65 C38.2@127,18.15
  other v2: 85.35,10.6 86.25,10.6 87.15,10.6 88.25,10.75 85.15,11.425 85.975,11.425 86.825,11.425 87.65,11.425 24.1,11.6 25,11.6 25.9,11.6 41.1,11.6 42,11.6 42.9,11.6 58.1,11.6 59,11.6 59.9,11.6 102.6,11.6 103.5,11.6 104.4,11.6 119.6,11.6 120.5,11.6 121.4,11.6 136.6,11.6 137.5,11.6 138.4,11.6 27,11.75 44,11.75 61,11.75 105.5,11.75 122.5,11.75 139.5,11.75 88.25,12 23.9,12.425 24.725,12.425 25.575,12.425 26.4,12.425 40.9,12.425 41.725,12.425 42.575,12.425 43.4,12.425 57.9,12.425 58.725,12.425 59.575,12.425 60.4,12.425 102.4,12.425 103.225,12.425 104.075,12.425 104.9,12.425 119.4,12.425 120.225,12.425 121.075,12.425 121.9,12.425 136.4,12.425 137.225,12.425 138.075,12.425 138.9,12.425 85.125,12.575 85.95,12.575 86.8,12.575 87.625,12.575 27,13 44,13 61,13 105.5,13 122.5,13 139.5,13 88.25,13.25 85.45,13.4 86.35,13.4 87.25,13.4 23.875,13.575 24.7,13.575 25.55,13.575 26.375,13.575 40.875,13.575 41.7,13.575 42.55,13.575 43.375,13.575 57.875,13.575 58.7,13.575 59.55,13.575 60.375,13.575 102.375,13.575 103.2,13.575 104.05,13.575 104.875,13.575 119.375,13.575 120.2,13.575 121.05,13.575 121.875,13.575 136.375,13.575 137.2,13.575 138.05,13.575 138.875,13.575 27,14.25 44,14.25 61,14.25 105.5,14.25 122.5,14.25 139.5,14.25 24.2,14.4 25.1,14.4 26,14.4 41.2,14.4 42.1,14.4 43,14.4 58.2,14.4 59.1,14.4 60,14.4 102.7,14.4 103.6,14.4 104.5,14.4 119.7,14.4 120.6,14.4 121.5,14.4 136.7,14.4 137.6,14.4 138.5,14.4 85.35,16.1 86.25,16.1 87.15,16.1 88.25,16.25 85.15,16.925 85.975,16.925 86.825,16.925 87.65,16.925 88.25,17.5 85.125,18.075 85.95,18.075 86.8,18.075 87.625,18.075 88.25,18.75 85.45,18.9 86.35,18.9 87.25,18.9
  other v4: 5,10.7 3.02,11.52 6.98,11.52 2.2,13.5 7.8,13.5 3.02,15.48 6.98,15.48 5,16.3
EN_GATE_1: U2.33 U4.16 U5.16 | length 108.7
  Top Layer w0.152: U5.16@32.85,39.8 32.85,41.56 32.271,42.139 32.271,42.661 32.639,43.029 42.739,43.029 43.024,42.744 49.844,42.744 50.1,43 v3(50.5,43) ; v3(50.1,39.9) 50.1,38.081 51.26,36.921 58.77,36.921 60.534,38.685 60.723,38.685 61.725,39.687 72.032,39.687 74.679,37.04 74.679,36.56 74.585,36.466 74.585,34.111 U2.33@75.273,33.424 75.276,33.424 76.746,31.954 76.746,31.729 77.475,31 v5(78,31) ; v5(83.9,30.5) 88.661,30.5 92.617,34.455 97.219,34.455 107.075,44.312 112.823,44.312 115.25,41.885 U4.16@115.25,39.8
  Bottom Layer w0.152: v3(50.1,39.9) 50.5,40.3 v3(50.5,43) ; v5(78,31) 78,30.975 78.875,30.1 79.575,30.1 79.829,29.846 83.246,29.846 v5(83.9,30.5)
ENC_V: J3.2 J9.1 J14.1 | length 38.9
  Top Layer w0.4: J14.1@90.5,48.6 90.5,47.3 92.8,45 v5(92.9,45) ; v5(102.1,46.8) 102.1,47 J9.1@103.7,48.6 ; v5(119.5,46.1) 118.59,47.01 118.59,47.55 J3.2@119.54,48.5
  Bottom Layer w0.4: v5(92.9,45) 93.075,45.175 99.975,45.175 101.6,46.8 v5(102.1,46.8) 102.4,46.8 104.053,45.147 112.551,45.147 113.679,46.275 117.575,46.275 117.678,46.378 119.222,46.378 v5(119.5,46.1)
GH_A_2: R15.1 U4.47 | length 21
  Top Layer w0.25: U4.47@118.25,32.2 118.25,30.85 123.886,25.214 133.636,25.214 R15.1@135,23.85
GH_A_3: R34.1 U5.47 | length 23.6
  Top Layer w0.203: 42.836,25.214 46.736,25.214
  Top Layer w0.25: U5.47@35.85,32.2 35.85,31.474 36.152,31.172 36.464,31.172 42.422,25.214 42.836,25.214 ; 46.736,25.214 49.704,25.214 52.743,22.175 R34.1@54.825,22.175
GH_B_2: R16.1 U4.42 | length 9.3
  Top Layer w0.25: U4.42@115.75,32.2 115.75,31.25 115.922,31.078 115.922,25.928 R16.1@118,23.85
GH_B_3: R35.1 U5.42 | length 11.8
  Top Layer w0.203: 33.478,30.91 33.478,28.361 37.989,23.85 R35.1@39.5,23.85
  Top Layer w0.25: U5.42@33.35,32.2 33.35,31.038 33.478,30.91
GH_C_2: R17.1 U4.37 | length 18.6
  Top Layer w0.25: R17.1@101,23.85 101,27.5 102.178,28.678 111.089,28.678 113.25,30.839 U4.37@113.25,32.2
GH_C_3: R36.1 U5.37 | length 14.5
  Top Layer w0.203: R36.1@22.5,23.85 22.4,23.95 23.745,25.295 23.745,28.271 24.152,28.678 28.689,28.678
  Top Layer w0.25: 28.689,28.678 30.85,30.839 U5.37@30.85,32.2
GL_A_2: R20.1 U4.45 | length 15
  Top Layer w0.25: U4.45@117.25,32.2 117.25,29.944 123.344,23.85 R20.1@127.5,23.85
GL_A_3: R38.1 U5.45 | length 18.3
  Top Layer w0.203: 34.85,31.009 37.08,28.78 37.081,28.78 37.48,28.381 37.48,28.38 42.009,23.85
  Top Layer w0.25: 34.85,31.009 U5.45@34.85,32.2 ; 42.009,23.85 R38.1@49,23.85
GL_B_2: R21.1 U4.40 | length 9.7
  Top Layer w0.25: R21.1@111.5,23.85 114.522,26.872 114.522,31.022 114.75,31.25 U4.40@114.75,32.2
GL_B_3: R39.1 U5.40 | length 8.8
  Top Layer w0.203: 32.122,31.022 32.122,26.188 33,25.31 R39.1@33,23.85
  Top Layer w0.25: 32.122,31.022 32.35,31.25 U5.40@32.35,32.2
GL_C_2: R22.1 U4.35 | length 21.8
  Top Layer w0.25: R22.1@94.5,23.85 100.25,29.6 110.73,29.6 112.25,31.12 U4.35@112.25,32.2
GL_C_3: R40.1 U5.35 | length 17.9
  Top Layer w0.203: R40.1@16,23.85 18.175,23.85 23.925,29.6 28.329,29.6
  Top Layer w0.25: 28.329,29.6 29.85,31.12 U5.35@29.85,32.2
GND: C2.2 C3.2 C4.1 C5.1 C6.1 C7.2 C8.2 C9.2 C10.2 C11.2 C12.2 C13.2 C14.2 C15.2 C16.2 C17.2 C18.2 C19.1 C20.1 C24.2 C25.2 C26.1 C27.2 C29.2 C32.1 C38.1 C39.2 C44.1 C50.1 C51.2 C55.1 C59.1 D1.A J1.5 J1.SH J2.3 J4.4 J7.1 J8.1 J9.5 J14.5 J22.5 J22.6 NT1.1 Q7.S Q8.S Q19.S Q20.S Q28.S Q29.S Q30.S R6.2 R13.2 R18.2 R19.2 R24.1 R25.1 R26.1 R28.1 R37.2 R42.1 R43.1 R44.1 R46.1 R51.2 R53.2 U1.2 U2.18 U2.63 U3.1 U4.44 U4.57 U5.44 U5.55 U5.57 U6.4 U6.9 XT1.G | length 309.9
  Top Layer w0.203: v5(13.2,39.5) 13.265,39.435 U1.2@13.265,37.975 ; v5(14,25.2) R46.1@14,26.55 ; R42.1@27.15,27.6 29.55,25.2 v5(31,25.2) ; R53.2@63.35,23.3 63.5,23.45 v5(63.5,25.2) ; U2.18@67.777,38.374 67.825,38.374 67.825,38.485 68.495,39.156 70.244,39.156 v3(70.3,39.1) ; U2.63@75.626,46.223 74.995,45.591 74.995,44.96 77.1,42.855 v3(77.1,42.5) ; v5(92.5,25.2) R28.1@92.5,26.55 ; v5(109.5,25.2) R24.1@109.5,27.7
  Top Layer w0.25: U5.57@33.6,36 33.6,33.701 34.35,32.951 U5.44@34.35,32.2 ; v1(34.15,36) v1(36.35,36) v1(36.35,34.9) 38,34.9 39.85,33.05 U5.55@39.85,32.2 ; U4.57@116,36 116,33.701 116.75,32.951 U4.44@116.75,32.2
  Top Layer w0.4: v1(30.85,36) v1(31.95,36) v1(33.05,36) U5.57@33.6,36 ; J14.5@100.66,48.6 100.66,46.64 v5(101.6,45.7) ; J9.5@113.86,48.6 114.5,48.6 117.375,45.725 117.875,45.725 v5(118,45.6)
  Top Layer w0.5: v5@63.48,25.2 v5(63.5,25.2) 63.9,24.8 U6.4@64.605,24.8 65.3,24.8 U6.9@66.5,26 U6.9@66,26.5 ; U3.1@124.7,47.3 126.3,47.3 v5(126.4,47.4) ; C29.2@127,33.125 127.1,33.225 v5(127.1,35.2)
  Bottom Layer w0.203: J1.5@4.325,39 4.525,39.2 J1.SH@4.525,40.125 1.8,40.125 J1.SH@1.5,40.425 1.25,40.175 J1.SH@1.25,38.65 J1.SH@1.25,36.75 1.25,35.225 J1.SH@1.5,34.975 1.762,34.713 J1.SH@3.2,34.713 4.312,34.713 J1.SH@4.525,34.5 ; J7.1@5,24 v4(5,26.8) ; C20.1@13.15,41.1 13.15,39.55 v5(13.2,39.5) ; R6.2@68.25,43.2 69.119,43.2 70.924,41.396 71.004,41.396 71.5,40.9 C6.1@71.5,40.7 ; v3(70.3,39.1) 71.1,39.1 C8.2@71.5,39.5 ; C8.2@71.5,39.4 C8.2@71.5,39.5 ; C5.1@72.9,39 C2.2@72.9,40.7 ; C9.2@74.3,39.4 C3.2@74.3,40.7 ; C4.1@75.9,39.4 C7.2@75.9,40.7 ; v3@77.3,42.3 C10.2@77.3,40.8 77.2,40.7 C7.2@75.9,40.7 ; C8.2@71.5,39.5 C6.1@71.5,40.7 ; C6.1@71.5,40.7 C2.2@72.9,40.7 ; C2.2@72.9,40.7 C3.2@74.3,40.7 ; C3.2@74.3,40.7 C7.2@75.9,40.7
  Bottom Layer w0.3: J1.SH@4.525,34.5 4.662,34.362 4.8,34.5 7.953,34.5 ; v4(5,26.8) 7.953,29.753 7.953,34.5 ; J4.4@17.62,48.7 13.222,44.302 13.222,41.1 C20.1@13.15,41.1 10.367,41.1 7.953,38.686 7.953,34.5 ; 85.8,30.7 86.153,30.347 87.863,30.347 NT1.1@88.3,30.784
  Bottom Layer w0.4: C10.2@77.3,40.8 78.1,40.8 79.5,39.4 XT1.G@79.5,39 ; 80.568,38.097 84.167,38.097 84.403,38.333 84.403,40.097 XT1.G@83.3,41.2
  Bottom Layer w0.5: C51.2@26.1,34.2 26.1,34.278 27.075,35.253 31.612,35.253 35.1,31.765 35.1,29.109 38.5,25.709 C17.2@38.5,23.35 C17.2@39,23.85 ; C44.1@32.9,38.5 33.05,38.35 v1(33.05,37.1) ; v1(36.35,36) R37.2@37.75,36 ; XT1.G@79.5,39 79.665,39 80.568,38.097 85.2,33.465 85.2,31.3 85.8,30.7 ; NT1.1@88.3,30.784 88.3,32.194 91.403,35.297 ; J2.3@91.08,36.5 91.08,35.62 91.403,35.297 ; v5(101.6,45.7) 102.806,44.494 108,44.494 ; v5(109.5,25.2) 106.372,28.328 106.372,33.743 107.029,34.4 108.3,34.4 C39.2@108.5,34.2 108.5,35.404 109.143,36.047 111.018,36.047 111.165,35.9 112.2,35.9 112.603,36.303 112.603,36.339 113.364,37.1 v1(115.45,37.1) ; R19.2@119.415,44.35 R18.2@121,44.35 ; C25.2@120.3,35 118.85,35 v1(118.75,34.9) v1(118.75,36) ; C19.1@124.7,47.05 126.221,47.05 ; v5(126.4,47.4) 126.221,47.221 126.221,47.05 ; C38.1@126.5,20.35 C38.1@127,19.85 ; v5(127.1,35.2) 127.419,35.2 127.782,35.563 130.963,35.563 D1.A@133.4,38 ; J22.5@139.2,41.88 J22.6@136.66,41.88 133.4,38.62 D1.A@133.4,38 ; 91.403,35.297 103.562,35.297 108,39.735 108,44.494 ; 108,44.494 112.91,44.494 114.016,45.6 v5(118,45.6) 118.35,45.6 119.25,44.7 119.25,44.35 R19.2@119.5,44.35 118.547,43.397 118.547,40.253 C24.2@120.3,38.5 C27.2@120.3,37 118.85,37 v1(118.75,37.1) v1(118.75,36) ; v1(118.75,36) 122.506,36 122.943,35.563 125.218,35.563 125.8,36.145 R13.2@125.8,36.65 126.897,37.747 126.897,39.127 127.323,39.553 ; 126.221,47.05 127.128,46.143 127.128,39.748 127.323,39.553 ; 127.323,39.553 131.847,39.553 D1.A@133.4,38
  Bottom Layer w2: v1@45.9,18.9 v1(45.9,19) v1(45.9,19.5) 45.9,21 ; v1@124.4,18.9 v1(124.4,19) v1(124.4,19.5) 124.4,21
  other v1: 45.4,18 45.9,18 46.4,18 123.9,18 124.4,18 124.9,18 45.4,18.5 45.9,18.5 46.4,18.5 123.9,18.5 124.4,18.5 124.9,18.5 45.4,19 46.4,19 123.9,19 124.9,19 45.4,19.5 46.4,19.5 123.9,19.5 124.9,19.5 66.5,20.5 67,20.5 67.5,20.5 68,20.5 68.5,20.5 69,20.5 69.5,20.5 70,20.5 70.5,20.5 71,20.5 66.5,21 67,21 67.5,21 68,21 68.5,21 69,21 69.5,21 70,21 70.5,21 71,21 66,25 67,25 66,26 67,26 66,27 67,27 30.85,34.9 31.95,34.9 33.05,34.9 34.15,34.9 35.25,34.9 113.25,34.9 114.35,34.9 115.45,34.9 116.55,34.9 117.65,34.9 35.25,36 113.25,36 114.35,36 115.45,36 116.55,36 117.65,36 30.85,37.1 31.95,37.1 34.15,37.1 35.25,37.1 36.35,37.1 113.25,37.1 114.35,37.1 116.55,37.1 117.65,37.1
  other v4: 5,21.2 3.02,22.02 6.98,22.02 2.2,24 7.8,24 3.02,25.98 6.98,25.98
GPIO_1_1: J5.4 U2.17 | length 31.3
  Top Layer w0.152: v3(49.2,39.9) 49.582,39.518 49.582,38.096 51.113,36.565 58.917,36.565 60.681,38.329 67.026,38.329 U2.17@67.424,38.727
  Bottom Layer w0.152: v3(49.2,39.9) 48.7,40.4 48.7,46.28 J5.4@51.12,48.7
GPIO_2_1: J5.3 U2.20 | length 33.1
  Top Layer w0.152: v3(48.3,38) 48.3,37.752 50.545,35.507 59.355,35.507 60.219,36.371 67.253,36.371 68.42,37.538 68.42,37.667 U2.20@68.485,37.667
  Bottom Layer w0.152: v3(48.3,38) 48.3,48.42 J5.3@48.58,48.7
GPIO_3_1: J5.2 U2.21 | length 35.3
  Top Layer w0.152: v3(47.4,38) 50.248,35.152 59.503,35.152 60.366,36.015 67.641,36.015 68.738,37.113 68.738,37.313 U2.21@68.838,37.313
  Bottom Layer w0.203: J5.2@46.04,48.7 47.9,46.84 47.9,38.5 v3(47.4,38)
GPIO_4_1: J5.1 U2.28 | length 42.1
  Top Layer w0.152: v3(43.4,38.7) 43.4,38.281 47.981,33.7 60.4,33.7 60.779,34.079 63.24,34.079 64.009,33.31 69.885,33.31 71.213,34.638 71.213,34.838 U2.28@71.313,34.838
  Bottom Layer w0.152: v3(43.4,38.7) 44.2,39.5 44.2,43.5 43.421,44.279 43.421,48.621 J5.1@43.5,48.7
GVDD: C32.2 C44.2 C55.2 D2.A U4.13 U5.13 U6.1 | length 108.4
  Top Layer w0.203: v5(63.2,30.5) 63.2,27.8 63.8,27.2 U6.1@64.605,27.2
  Top Layer w0.25: U5.13@34.35,39.8 34.35,39.05 35.267,38.133 37.467,38.133 v3(37.6,38) ; v3(110.5,36.8) 111.356,36.8 112.689,38.133 115.833,38.133 116.75,39.05 U4.13@116.75,39.8
  Bottom Layer w0.203: v5(63.2,30.5) 64.85,30.5 D2.A@64.95,30.4
  Bottom Layer w0.5: C44.2@34.3,38.5 37,38.5 37.5,38 v3(37.6,38) 37.928,38.328 39.343,38.328 40.353,37.318 40.353,30.553 42.995,27.911 95.74,27.911 100.857,33.028 104.663,33.028 108.529,36.894 C32.2@111.894,36.894
  other v5: 62.9,28.1
M0_AH_1: U2.41 U4.17 | length 48.8
  Top Layer w0.152: U2.41@78.101,36.252 78.101,36.152 78.277,35.977 78.477,35.977 80,34.454 v5(80,34.2) ; v5(81.5,32.8) 83.246,31.054 83.246,30.229 83.629,29.846 88.51,29.846 92.764,34.1 97.366,34.1 107.222,43.956 112.676,43.956 114.679,41.953 114.679,39.8 U4.17@114.75,39.8
  Bottom Layer w0.152: v5(80,34.2) 81.4,32.8 v5(81.5,32.8)
M0_AL_1: U2.34 U4.18 | length 51.2
  Top Layer w0.152: U2.34@75.626,33.777 77.5,31.904 v5(77.5,31.9) ; v5(80.5,32.5) 81.521,31.479 82.14,31.479 82.479,31.14 82.479,30.493 83.607,29.365 94.467,29.365 97.555,32.454 97.555,33.787 107.369,43.601 112.529,43.601 114.25,41.88 U4.18@114.25,39.8
  Bottom Layer w0.152: v5(77.5,31.9) 78.554,32.954 80.046,32.954 v5(80.5,32.5)